# EAGLE board ServoV1.3 (EAGLE 5.06)
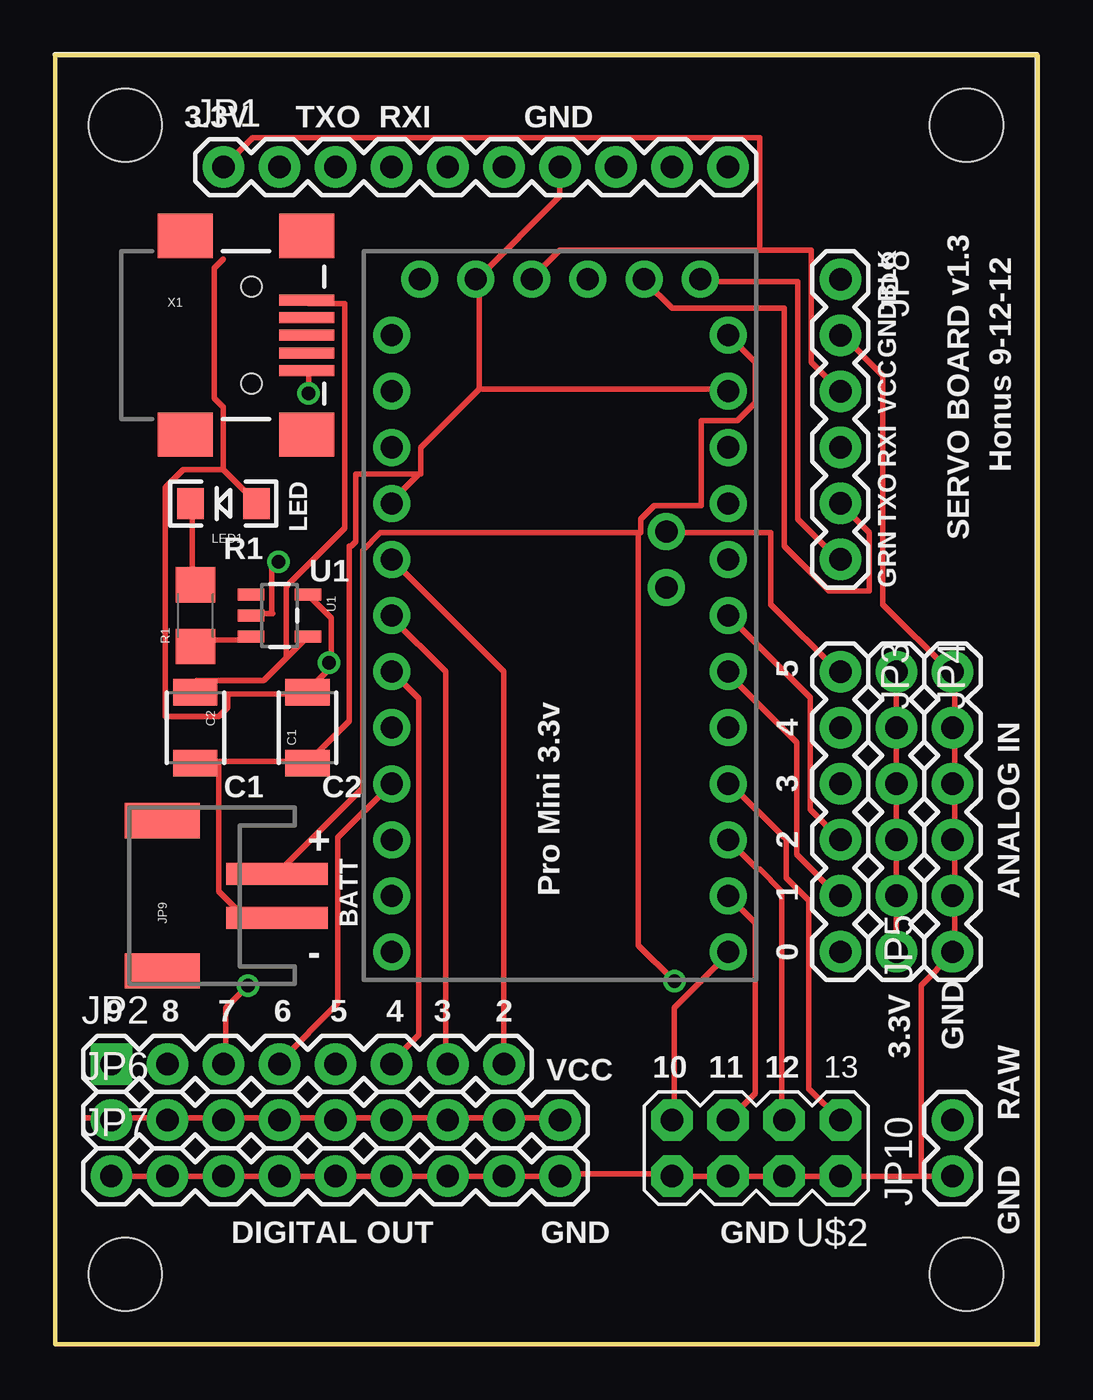
[diagram p0: board, top side]
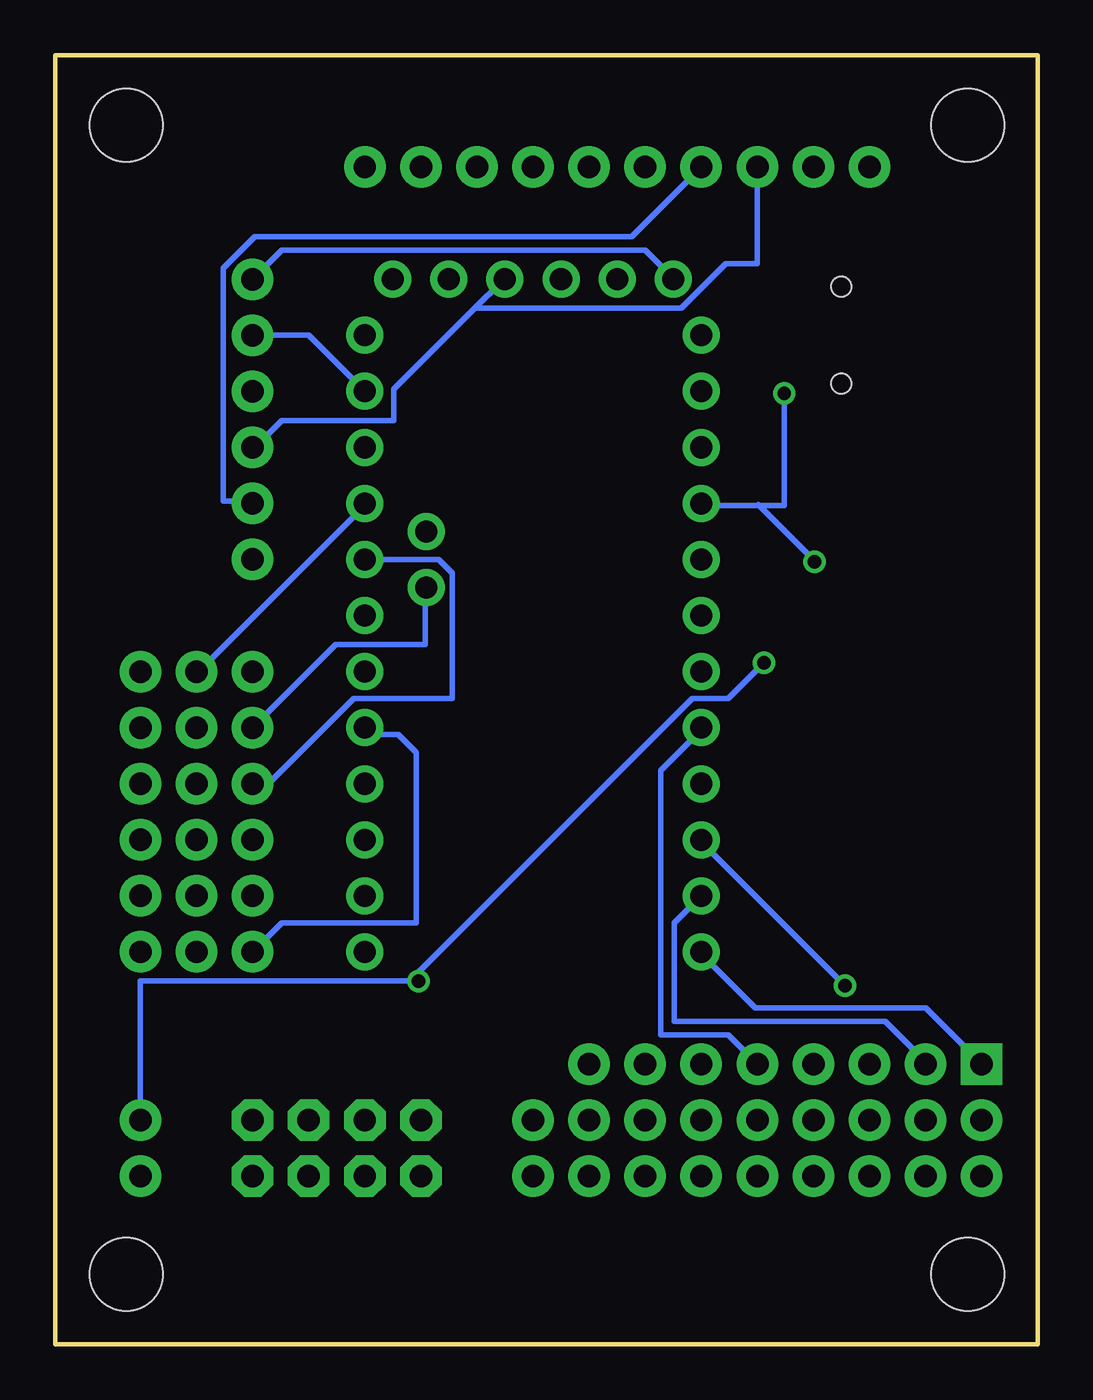
[diagram p1: board, bottom side, seen from below]

Size 44.5 x 58.41 mm. Coordinates in mm from the lower left corner, seen from the top.
Outline: 0,0 44.5,0 44.5,58.41 0,58.41 0,0
Copper layers (1*16): Top 0.035mm / dielectric 1.5mm / Bottom 0.035mm
Design rules "default": minimum track width 10mil, minimum drill 24mil, track to track 8mil, track to pad 8mil, pad to pad 8mil, via to via 8mil, smd to smd 8mil, copper to edge 40mil, drill to drill 8mil, minimum pad ring 10mil, minimum via ring 8mil, stop-mask expansion 4mil, vias tented up to drill 0mil, thermal gap 10mil

## Footprints (pad centres in the part's own frame; a part is rotated, then mirrored left to right if it is on the bottom)
1210 = smd 1.2 x 2: 1 -1.6,0; 2 1.6,0
1X10 = drill 1.016 pad 1.88 round: 1 0,0; 2 2.54,0; 3 5.08,0; 4 7.62,0; 5 10.16,0; 6 12.7,0; 7 15.24,0; 8 17.78,0; 9 20.32,0; 10 22.86,0
1X08 = drill 1.016 pad 1.88 square: 1 0,0 | drill 1.016 pad 1.88 round: 2 2.54,0; 3 5.08,0; 4 7.62,0; 5 10.16,0; 6 12.7,0; 7 15.24,0; 8 17.78,0
1X06 = drill 1.016 pad 1.88 round: 1 0,0; 2 2.54,0; 3 5.08,0; 4 7.62,0; 5 10.16,0; 6 12.7,0
1X09 = drill 1.016 pad 1.88 round: 1 0,0; 2 2.54,0; 3 5.08,0; 4 7.62,0; 5 10.16,0; 6 12.7,0; 7 15.24,0; 8 17.78,0; 9 20.32,0
S2B-PH = smd 1 x 4.6: 1 -1,-3.7; 2 1,-3.7 | smd 1.6 x 3.4: NC1 -3.4,1.5; NC2 3.4,1.5
1X02 = drill 1.016 pad 1.88 round: 1 0,0; 2 2.54,0
STAND-OFF = hole 3.302: 0,0
LED-1206 = smd 1.2 x 1.4: A -1.5,0; C 1.5,0
1206 = smd 1.6 x 1.8: 1 -1.4,0; 2 1.4,0
SOT23-5 = smd 0.55 x 1.2: 1 -0.95,-1.3; 2 0,-1.3; 3 0.95,-1.3; 4 0.95,1.3; 5 -0.95,1.3
PROMINI328V1 = drill 1 pad 1.676 round: P$1 -7.62,-15.24; P$2 -7.62,-12.7; P$3 -7.62,-10.16; P$4 -7.62,-7.62; P$5 -7.62,-5.08; P$6 -7.62,-2.54; P$7 -7.62,0; P$8 -7.62,2.54; P$9 -7.62,5.08; P$10 -7.62,7.62; P$11 -7.62,10.16; P$12 -7.62,12.7; P$13 -6.35,15.24; P$14 -3.81,15.24; P$15 -1.27,15.24; P$16 1.27,15.24; P$17 3.81,15.24; P$18 6.35,15.24; P$19 7.62,12.7; P$20 7.62,10.16; P$21 7.62,7.62; P$22 7.62,5.08; P$23 4.826,3.81; P$24 4.826,1.27; P$25 7.62,2.54; P$26 7.62,0; P$27 7.62,-2.54; P$28 7.62,-5.08; P$29 7.62,-7.62; P$30 7.62,-10.16; P$31 7.62,-12.7; P$32 7.62,-15.24
2X4 = drill 1.016 pad 1.88 octagon: 1 -3.81,-1.27; 2 -3.81,1.27; 3 -1.27,-1.27; 4 -1.27,1.27; 5 1.27,-1.27; 6 1.27,1.27; 7 3.81,-1.27; 8 3.81,1.27
USB-MINIB = smd 2.5 x 0.5: D+ 2.5,0; D- 2.5,0.8; GND 2.5,-1.6; ID 2.5,-0.8; VBUS 2.5,1.6 | smd 2.5 x 2: GND@1 -3,-4.5; GND@2 -3,4.5; GND@3 2.5,4.5; GND@4 2.5,-4.5 | hole 0.9: 0,2.2; 0,-2.2

## Placement (x,y rotation side)
C1  1uF  [1210]  11.43,27.94 90 top
C2  1uF  [1210]  6.35,27.94 270 top
JP1  M10"  [1X10]  7.62,53.34 0 top
JP2  [1X08]  2.54,12.7 0 top
JP3  [1X06]  35.56,30.48 270 top
JP4  3.3V  [1X06]  38.1,30.48 270 top
JP5  [1X06]  40.64,17.78 90 top
JP6  M09  [1X09]  2.54,10.16 0 top
JP7  M09  [1X09]  2.54,7.62 0 top
JP8  [1X06]  35.56,48.26 270 top
JP9  BATT  [S2B-PH]  6.35,20.32 90 top
JP10  RAW  [1X02]  40.64,7.62 90 top
JP11  STAND-OFF  [STAND-OFF]  41.27,3.17 0 top
JP12  STAND-OFF  [STAND-OFF]  41.27,55.24 0 top
JP13  STAND-OFF  [STAND-OFF]  3.17,55.24 0 top
JP14  STAND-OFF  [STAND-OFF]  3.17,3.17 0 top
LED1  [LED-1206]  7.62,38.1 180 top
R1  1K  [1206]  6.35,33.02 90 top
U1  MAX1555  [SOT23-5]  10.16,33.02 270 top
U$1  PROMINI328V13.3V  [PROMINI328V1]  22.86,33.02 0 top
U$2  M04X2  [2X4]  31.75,8.89 180 top
X1  USBSMD  [USB-MINIB]  8.89,45.72 0 top

## Library data of the parts
C1 C2 JP1-JP14 LED1 R1 U1 U$2 X1 = SparkFun
U$1 = Arduino

## Nets
GND: C1.1 C2.2 JP1.7 JP5.1 JP5.2 JP5.3 JP5.4 JP5.5 JP5.6 JP7.1 JP7.2 JP7.3 JP7.4 JP7.5 JP7.6 JP7.7 JP7.8 JP7.9 JP8.2 JP9.1 JP10.1 U1.2 U$1.P$9 U$1.P$14 U$1.P$20 U$2.2 U$2.4 U$2.6 U$2.8 X1.GND
N$1: U$1.P$29 U$2.1
N$2: U$1.P$30 U$2.3
N$3: U$1.P$31 U$2.5
N$4: U$1.P$32 U$2.7
N$5: JP2.1 U$1.P$1
N$6: JP2.2 U$1.P$2
N$7: JP2.3 U$1.P$3
N$8: JP2.4 U$1.P$4
N$9: JP2.5 U$1.P$5
N$10: JP2.6 U$1.P$6
N$11: JP3.1 U$1.P$23
N$12: JP3.2 U$1.P$24
N$13: JP3.3 U$1.P$25
N$14: JP3.4 U$1.P$26
N$15: JP3.5 U$1.P$27
N$16: JP3.6 U$1.P$28
N$17: C2.1 U1.4 X1.VBUS
N$18: LED1.C R1.2
N$19: R1.1 U1.3
N$20: C1.2 JP9.2 JP10.2 LED1.A U1.5 U$1.P$19
N$21: JP8.6 U$1.P$18
N$22: JP1.4 JP8.5 U$1.P$17
N$23: JP1.3 JP8.4 U$1.P$16
N$24: JP1.1 JP8.3 U$1.P$15
N$25: JP6.1 JP6.2 JP6.3 JP6.4 JP6.5 JP6.6 JP6.7 JP6.8 JP6.9
N$26: JP8.1 U$1.P$13
N$27: JP4.1 JP4.2 JP4.3 JP4.4 JP4.5 JP4.6 U$1.P$22
N$28: JP2.7 U$1.P$7
N$29: JP2.8 U$1.P$8

## Tracks (layer width: path | path; a pad name or v marks a point on that pad's centre or on a via)
GND  (via drill 0.61)
  Top 0.254: 40.74,20.32 40.74,17.88 JP5.1 40.64,17.68 39.22,16.26 39.22,7.62 | 40.74,25.4 40.74,22.96 JP5.3 40.74,22.76 40.74,20.32 | 40.74,20.32 JP5.2 | 40.74,25.4 40.74,27.84 JP5.5 40.74,28.04 40.74,30.48 JP5.6 40.54,30.48 37.49,33.53 37.49,43.89 35.66,45.72 JP8.2 | 40.74,25.4 JP5.4 | 39.22,7.62 U$2.2 U$2.4 U$2.6 U$2.8 27.84,7.72 22.96,7.72 JP7.9 JP7.8 JP7.7 JP7.6 JP7.5 JP7.4 JP7.3 JP7.2 JP7.1 | 39.22,7.62 JP10.1 | JP1.7 22.86,52.02 19.2,48.36 U$1.P$14 19.2,48.16 19.2,43.28 | 19.2,43.28 30.38,43.28 U$1.P$20 | 7.42,26.42 11.28,26.42 C1.1 11.48,26.42 13.31,28.25 13.31,36.17 13.41,36.17 13.61,36.37 13.61,39.42 16.46,39.42 | 7.42,26.42 6.4,26.42 C2.2 | 7.42,26.42 7.42,20.52 8.43,19.51 9.86,19.51 JP9.1 | 9.8,33.12 9.04,33.12 U1.2 | 9.8,33.12 9.86,33.12 | v11.48,43.08 11.48,44.09 X1.GND | 19.2,43.28 16.56,40.64 16.56,39.42 16.46,39.42 | v10.11,35.46 10.01,35.41 9.8,35.2 9.8,33.12 | 16.46,39.42 15.24,38.2 U$1.P$9
  Bottom 0.254: JP5.1 40.54,17.68 | U$1.P$20 33.02,45.72 JP8.2 | v11.48,43.08 11.48,38 12.65,38 | v10.11,35.46 10.21,35.61 12.65,38.05 12.65,38 | U$1.P$9 15.24,38 12.65,38
N$1
  Top 0.254: U$1.P$29 30.58,25.4 33.02,22.96 33.12,22.96 33.12,21.13 34.14,20.12 34.14,11.58 U$2.1
N$2
  Top 0.254: U$1.P$30 31.8,21.54 31.9,21.54 32.92,20.52 32.92,10.16 U$2.3
N$3
  Top 0.254: 30.38,20.32 U$1.P$31 31.7,19.1 31.7,11.38 U$2.5
N$4
  Top 0.254: U$1.P$32 30.48,17.68 28.04,15.24 28.04,10.16 U$2.7
N$5
  Bottom 0.254: U$1.P$1 15.24,17.68 12.8,15.24 5.08,15.24 JP2.1
N$6
  Bottom 0.254: U$1.P$2 16.46,19.1 16.46,14.63 6.91,14.63 5.08,12.8 JP2.2
N$7  (via drill 0.61)
  Top 0.254: v8.74,16.26 7.72,15.24 7.72,12.8 JP2.3
  Bottom 0.254: v8.74,16.26 15.24,22.76 U$1.P$3
N$8
  Top 0.254: U$1.P$4 12.8,22.96 12.8,15.44 10.16,12.8 JP2.4
N$9
  Bottom 0.254: U$1.P$5 15.24,27.84 17.07,26.01 17.07,14.02 14.02,14.02 JP2.5
N$10
  Top 0.254: U$1.P$6 16.46,29.26 16.46,14.02 15.24,12.8 JP2.6
N$11
  Top 0.254: U$1.P$23 27.74,36.78 32.41,36.78 32.41,33.53 35.46,30.48 JP3.1
N$12
  Bottom 0.254: U$1.P$24 27.74,34.14 27.74,31.7 31.8,31.7 JP3.2
N$13
  Bottom 0.254: U$1.P$25 27.13,35.56 26.52,34.95 26.52,29.26 30.99,29.26 34.85,25.4 JP3.3
N$14
  Top 0.254: U$1.P$26 34.19,29.31 34.19,24.23 JP3.4
N$15
  Top 0.254: U$1.P$27 30.53,30.33 33.58,27.28 33.58,22.2 35.41,20.37 JP3.5
  Bottom 0.254: U$1.P$27 30.58,30.48
N$16
  Bottom 0.254: U$1.P$28 30.18,27.64 28.96,27.64 28.14,26.82 28.14,19.1 34.24,19.1 JP3.6
N$17
  Top 0.254: 10.46,31.09 9.45,30.07 6.4,30.07 6.4,29.67 C2.1 | 10.46,31.09 11.28,31.9 U1.4 | 10.46,31.09 10.46,34.34 13.11,36.98 13.11,47.14 11.48,47.14 X1.VBUS
N$18
  Top 0.254: LED1.C 6.2,38 6.2,34.54 R1.2
N$19
  Top 0.254: U1.3 8.84,31.9 6.4,31.9 6.4,31.7 R1.1
N$20  (via drill 0.61)
  Top 0.254: 12.5,30.89 12.5,30.68 11.48,29.67 C1.2 11.28,29.46 7.82,29.46 7.82,28.85 7.42,28.45 4.98,28.45 4.98,38.81 5.79,39.62 7.62,39.62 | 12.5,30.89 12.5,32.92 11.48,33.93 U1.5 | 7.62,39.62 9.04,38.2 LED1.A | 7.62,39.62 7.62,42.47 7.21,42.88 7.21,48.77 7.62,49.17 | 26.42,36.78 14.73,36.78 13.92,35.97 13.92,25.2 10.06,21.34 JP9.2 | 26.42,36.78 26.52,36.78 26.52,37.39 27.13,38 29.11,38 29.26,38 29.26,41.86 30.89,41.86 31.7,42.67 31.7,44.5 U$1.P$19 | v28.04,16.46 26.42,18.09 26.42,36.78 | v12.39,30.89 12.5,30.89
  Bottom 0.254: JP10.2 40.64,16.46 28.45,16.46 | v12.39,30.89 14.02,29.26 15.65,29.26 28.45,16.46 | v28.04,16.46 28.45,16.46
N$21
  Top 0.254: U$1.P$18 29.36,48.16 33.63,48.16 33.63,37.39 35.46,35.56 JP8.6
N$22
  Top 0.254: U$1.P$17 26.72,48.16 27.94,46.94 33.02,46.94 33.02,36.17 35.05,34.14 36.88,34.14 36.88,36.78 JP8.5
  Bottom 0.254: JP1.4 18.39,50.19 35.46,50.19 36.88,48.77 36.88,38.2 35.66,38.2 JP8.5
N$23
  Bottom 0.254: 25.5,46.94 29.16,43.28 29.16,41.86 34.24,41.86 35.46,40.64 JP8.4 | 25.5,46.94 24.28,48.16 U$1.P$16 | 25.5,46.94 16.15,46.94 14.12,48.97 12.7,48.97 JP1.3
N$24
  Top 0.254: 31.9,49.58 22.86,49.58 21.64,48.36 U$1.P$15 | 31.9,49.58 34.24,49.58 34.24,44.5 JP8.3 | 31.9,49.58 31.9,54.66 8.94,54.66 JP1.1
N$25
  Top 0.254: 20.32,10.26 17.88,10.26 JP6.7 17.68,10.26 15.24,10.26 | 20.32,10.26 22.76,10.26 JP6.9 | 20.32,10.26 JP6.8 | 15.24,10.26 12.8,10.26 JP6.5 12.6,10.26 10.16,10.26 | 5.08,10.26 1.37,10.26 JP6.1 | 10.16,10.26 7.72,10.26 JP6.3 7.52,10.26 5.08,10.26 | 5.08,10.26 JP6.2 | 10.16,10.26 JP6.4 | 15.24,10.26 JP6.6
N$26
  Bottom 0.254: U$1.P$13 16.56,48.36 17.78,49.58 34.24,49.58 JP8.1
N$27
  Top 0.254: JP4.6 JP4.5 JP4.4 JP4.3 JP4.2 JP4.1
  Bottom 0.254: JP4.1 38,30.48 30.48,38 U$1.P$22
N$28
  Top 0.254: U$1.P$7 15.24,32.92 17.68,30.48 17.68,12.8 JP2.7
N$29
  Top 0.254: U$1.P$8 20.32,30.48 JP2.8

## Text on the board
tPlace: 3.3V | TXO | RXI | GND | SERVO BOARD v1.3 | Honus 9-12-12 | BLK | GND | VCC | RXI | LED | TXO | R1 | U1 | GRN | 5 | 4 | C1 | C2 | 3 | + | 2 | Pro Mini 3.3v | 1 | ANALOG IN | BATT | - | 0 | 9 | 8 | 7 | 6 | 5 | 4 | 3 | 2 | VCC | 3.3V | GND | 10 | 11 | 12 | 13 | RAW | GND | DIGITAL OUT | GND | GND